# EAGLE board plugV4 (EAGLE 7.5.0)

Size 53 x 48 mm. Coordinates in mm from the lower left corner, seen from the top.
Outline: 0,0 53,0 53,48 0,48 0,0
Copper layers (1*16): Top 0.035mm / dielectric 1.5mm / Bottom 0.035mm
Design rules "default": minimum track width 10mil, minimum drill 24mil, track to track 8mil, track to pad 8mil, pad to pad 8mil, via to via 8mil, smd to smd 8mil, copper to edge 40mil, drill to drill 8mil, minimum pad ring 10mil, minimum via ring 8mil, stop-mask expansion 4mil, vias tented up to drill 0mil, thermal gap 10mil

## Footprints (pad centres in the part's own frame; a part is rotated, then mirrored left to right if it is on the bottom)
C025-030X050 = drill 0.813 octagon: 1 -1.27,0; 2 1.27,0
SH22,5A = drill 1.321 pad 2.54 long: 1 -11.252,0; 2 11.252,0
78XXL = drill 1.016 long: GND 0,-3.81; IN -2.54,-3.81; OUT 2.54,-3.81 | hole 3.302: 0,11.176
2X11 = drill 1.016 octagon: 1 -12.7,-1.27; 2 -12.7,1.27; 3 -10.16,-1.27; 4 -10.16,1.27; 5 -7.62,-1.27; 6 -7.62,1.27; 7 -5.08,-1.27; 8 -5.08,1.27; 9 -2.54,-1.27; 10 -2.54,1.27; 11 0,-1.27; 12 0,1.27; 13 2.54,-1.27; 14 2.54,1.27; 15 5.08,-1.27; 16 5.08,1.27; 17 7.62,-1.27; 18 7.62,1.27; 19 10.16,-1.27; 20 10.16,1.27; 21 12.7,-1.27; 22 12.7,1.27
LED3MM = drill 0.813 octagon: A -1.27,0; K 1.27,0
1X03 = drill 1.016 long: 1 -2.54,0; 2 0,0; 3 2.54,0
0204/5 = drill 0.813 octagon: 1 -2.54,0; 2 2.54,0
SW2-5.0-6.0X3.0X4.3MM = drill 0.8 pad 1.27: 1 -2.5,0; 2 2.5,0
HLK-PM01 = drill 0.8 square: +5V 31.7,2.4; AC1 2.3,12.6; AC2 2.3,7.6; GND 31.7,17.8
AK300/2 = drill 1.321 long: 1 -2.515,0; 2 2.489,0

## Placement (x,y rotation side)
C1  0.33uF  [C025-030X050]  30.48,36.83 0 top
C2  0.1uF  [C025-030X050]  24.13,36.83 0 top
F1  FUSESH22,5A  [SH22,5A]  6.35,26.67 90 top
IC1  7833  [78XXL]  16.51,40.64 0 top
JP1  ESP8266  [2X11]  45.72,31.75 270 bottom
LED  [LED3MM]  29.21,44.45 0 top
NEO  [1X03]  46.45,2.54 0 top
PIR  [1X03]  38.83,10.16 0 top
R1  230  [0204/5]  36.83,34.29 90 top
R2  470  [0204/5]  36.83,24.13 270 top
RELAY1  [1X03]  5.08,44.45 0 top
RELAY2  [1X03]  17.78,44.45 0 top
SW1  [SW2-5.0-6.0X3.0X4.3MM]  37.56,3.81 180 top
U$1  HLK-PM01  [HLK-PM01]  12.43,34.29 270 top
X1  220V  [AK300/2]  5.08,6.35 0 top

## Library data of the parts
C1 C2 R1 R2 = rcl
F1 = fuse; OC_FARNELL: unknown; OC_NEWARK: unknown
IC1 = v-reg
JP1 NEO PIR RELAY1 RELAY2 = pinhead
LED = led
SW1 = Seeed-OPL-Switch
U$1 = HLK-PM01
X1 = con-ptr500; OC_FARNELL: unknown; OC_NEWARK: unknown

## Nets
+3V3: C2.1 IC1.OUT JP1.8
+5V: C1.1 IC1.IN NEO.1 PIR.1 RELAY1.1 RELAY2.1 U$1.+5V
GND: C1.2 C2.2 IC1.GND JP1.15 NEO.3 PIR.3 R1.2 RELAY1.3 RELAY2.3 SW1.2 U$1.GND
N$1: F1.1 X1.1
N$2: F1.2 U$1.AC1
N$3: U$1.AC2 X1.2
N$4: LED.K R1.1
N$5: JP1.16 PIR.2
N$6: JP1.4 LED.A
N$7: JP1.5 NEO.2
N$8: JP1.6 RELAY1.2
N$9: JP1.7 RELAY2.2
N$10: R2.2 SW1.1
N$11: JP1.17 R2.1

## Tracks (layer width: path | path; a pad name or v marks a point on that pad's centre or on a via)
+3V3  (2 unrouted)
+5V  (6 unrouted)
GND  (10 unrouted)
N$1  (1 unrouted)
N$2  (1 unrouted)
N$3  (1 unrouted)
N$4  (1 unrouted)
N$5  (1 unrouted)
N$6  (1 unrouted)
N$7  (1 unrouted)
N$8  (1 unrouted)
N$9  (1 unrouted)
N$10  (1 unrouted)
N$11  (1 unrouted)